# Altium PCB MDBU004A.PcbDoc (part 2 of 2)
Units mil, origin at the board's own origin, x right, y up, seen from the top; angles counter-clockwise.
Board outline 2000 x 3000 mil, 2 copper layers (Top Layer, Bottom Layer), stack 63.4 mil thick; 60 components, 60 nets, 274 pads, 201 vias.
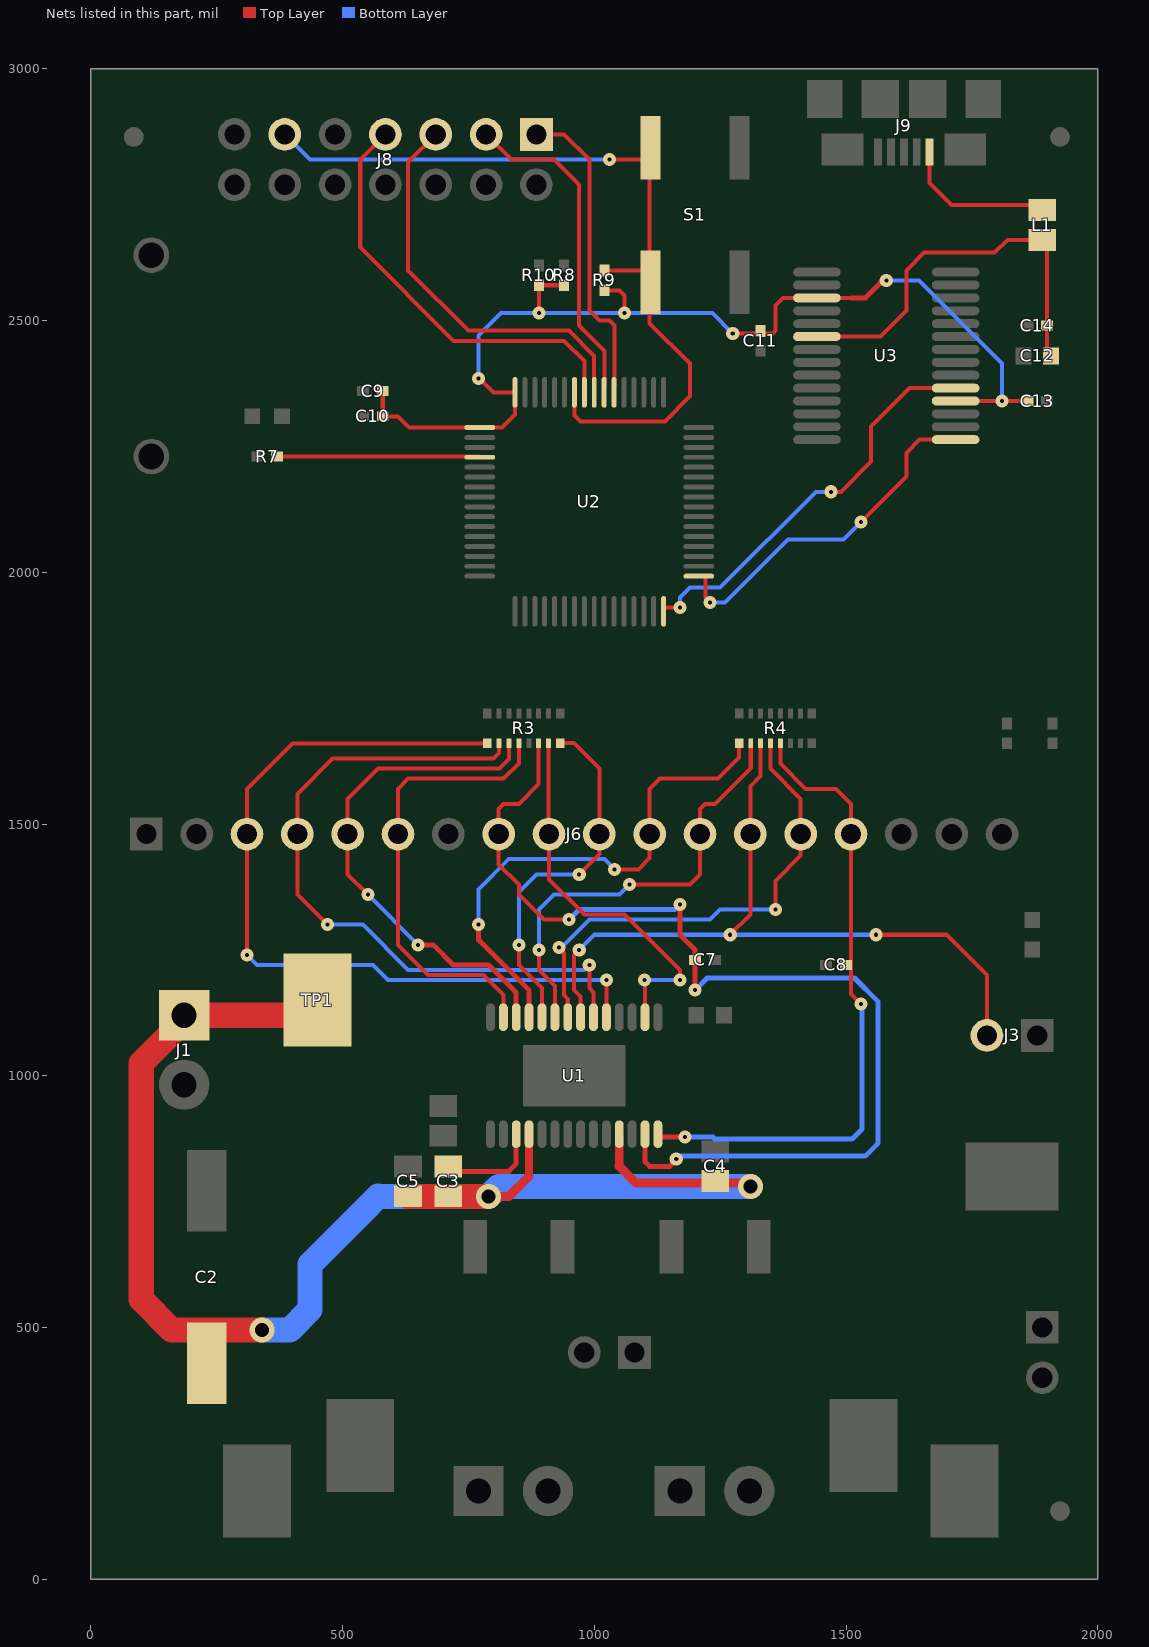
[diagram p2: the nets of this part, all layers, seen from the top]

## Via types
v1: diameter 26, hole 8, Top Layer to Bottom Layer, tented both sides, 180 vias
v2: diameter 19.68, hole 7.87, Top Layer to Bottom Layer, 15 vias
v3: diameter 50, hole 28, Top Layer to Bottom Layer, tented both sides, 5 vias
v4: diameter 26, hole 8, Top Layer to Bottom Layer, tented top, 1 vias

## Nets (pads, with @x,y where several pads share a name; then routed paths per layer and width w, separated by ;. In a path a pad name is that pad's centre, name@x,y a point inside that pad or via, vN(x,y) a via of type N, cw(c..) or ccw(c..) an arc to the next point about the centre after c; other vN are vias at no path point) (continued)
PIN13: C7.1 J6.8 R3.6 U1.13 | length 2093
  Top Layer w8: R3.6@889.53,1660.47 889.53,1579.53 850,1540 820,1540 810,1530 810,1490 810,1420 850,1380 850,1360 900,1310 v1(950,1310)
  Top Layer w10: U1.13@1100.75,857.8 1100.75,829.25 1110,820 1150,820 1162.76,832.76 v1(1162.76,834.49) ; v1(1170,1340) 1170,1280 1200.32,1249.68 C7.1@1200.32,1230 v1(1200.32,1170)
  Bottom Layer w10: v1(950,1310) 970,1330 1160,1330 v1(1170,1340) ; v1(1162.76,834.49) 1168.27,840 1538,840 1564,866 1564,1147 1517,1194 1224.32,1194 v1(1200.32,1170)
PIN14: C8.1 J6.15 R4.5 U1.14 | length 1285.5
  Top Layer w8: R4.5@1369.84,1660.47 1369.84,1620.16 1420,1570 1480,1570 1510,1540 1510,1490 1510,1162 v1(1530,1142)
  Top Layer w10: U1.14@1126.34,877.8 v1(1180,877.8)
  Bottom Layer w10: v1@1183.6,874.2 v1(1180,877.8) 1235.61,877.8 1239.28,874.13 1512.13,874.13 1532,894 v1@1532,1139
PIN19: J6.3 R3.1 U1.19 | length 1649.6
  Top Layer w8: v1(310,1240) 310,1490 310,1570 400,1660 R3.1@787.66,1660 ; U1.19@1023.98,1120 v1(1023.98,1190)
  Bottom Layer w8: v1(310,1240) 330,1220 560,1220 590,1190 v1(1023.98,1190)
PIN20: J6.4 R3.2 U1.20 | length 1404.4
  Top Layer w8: v1(470,1300) 410,1360 410,1560 480,1630 800,1630 810.79,1640.79 R3.2@810.79,1660.47 ; v1(990,1220) 990,1173.98 998.39,1165.59 998.39,1121.61 U1.20@1000,1120
  Bottom Layer w8: v1(470,1300) 540,1300 630,1210 980,1210 v1(990,1220)
PIN21: J3.2 J6.13 R4.3 U1.21 | length 1520.5
  Top Layer w8: v1(970,1250) 960,1240 960,1170 972.8,1157.2 U1.21@972.8,1120 ; v1(1270,1280) 1310,1320 1310,1490 1310,1575 1330.47,1595.47 R4.3@1330.47,1660.47 ; v1(1560,1280) 1700,1280 1780,1200 J3.2@1780,1080
  Bottom Layer w8: v1(970,1250) 1000,1280 v1(1270,1280) v1(1560,1280)
PIN22: J6.14 R4.4 U1.22 | length 979.2
  Top Layer w8: v1(930,1255) 940,1245 940,1160 947.2,1152.8 U1.22@947.2,1120 ; R4.4@1350.16,1660.47 1350.16,1609.84 1410,1550 1410,1490 1410,1437 1360,1387 v1(1360,1330)
  Bottom Layer w8: v1(930,1255) 935,1255 990,1310 1230,1310 1250,1330 v1(1360,1330)
PIN23: J6.12 R4.2 U1.23 | length 876
  Top Layer w8: v1(890,1250) 890,1210 921.61,1178.39 U1.23@921.61,1120 ; v1(1070,1380) 1190,1380 1210,1400 1210,1490 1210,1530 1220,1540 1240,1540 1310.79,1610.79 R4.2@1310.79,1660.47
  Bottom Layer w8: v1@890,1260 890,1330 920,1360 1050,1360 v1(1070,1380)
PIN24: J6.10 R3.8 U1.24 | length 723.7
  Top Layer w8: v1(850,1260) 850,1220 896.02,1173.98 U1.24@896.02,1120 ; R3.8@932.34,1660.47 959.53,1660.47 1010,1610 1010,1490 1010,1440 v4(970,1400)
  Bottom Layer w8: v1(850,1260) 850,1365 885,1400 v4(970,1400)
PIN25: J6.11 R4.1 U1.25 | length 1043.5
  Top Layer w8: v1(1040,1410) 1088,1410 1110,1432 1110,1490 1110,1570 1130,1590 1245.32,1590 1287.66,1632.34 R4.1@1287.66,1660.47
  Top Layer w10: v1(770,1300) 770,1270 870.43,1169.57 U1.25@870.43,1120
  Bottom Layer w8: v1(770,1300) 770,1370 830,1430 1020,1430 v1(1040,1410)
RST: J8.11 R9.1 S1.3 S1.4 U2.58 | length 1740.1
  Top Layer w8: U2.58@960,2380 960.18,2357.52 U2.58@960.4,2329.6 ; U2.58@960.47,2357.52 960.47,2311.73 972.2,2300 1140,2300 1190,2350 1190,2414.72 1110,2494.72 S1.3@1110,2850 ; R9.1@1020,2600 S1.4@1120,2600 ; v1(1030,2820) S1.3@1120,2820
  Bottom Layer w8: J8.11@385,2870 435,2820 v1(1030,2820)
RX: U2.32 U3.5 | length 846
  Top Layer w8: U2.32@1137.7,1929 1138.7,1930 v1(1170,1930) ; v1(1470,2160) 1490,2160 1550,2220 1550,2290 1626,2366 U3.5@1750,2366
  Bottom Layer w8: v1(1170,1930) 1170,1950 1190,1970 1250,1970 1440,2160 v1(1470,2160)
STATUS: R7.2 U2.4 | length 398.3
  Top Layer w8: R7.2@371.65,2230 U2.4@770,2230
TCK: J8.7 U2.57 | length 832.9
  Top Layer w8: J8.7@585,2870 535,2820 535,2645 720,2460 940,2460 980.1,2419.9 U2.57@980.1,2371
TDI: J8.3 U2.55 | length 646.3
  Top Layer w8: J8.3@785,2870 834.99,2820 920,2820 970,2770 970,2490 1020,2440 1020,2371.5 U2.55@1019.5,2371
TDO: J8.1 U2.54 | length 607.5
  Top Layer w8: J8.1@885,2870 940,2870 990,2820 990,2520 1010,2500 1030,2500 1040,2490 1040,2371.8 U2.54@1039.2,2371
TMS: J8.5 U2.56 | length 791.9
  Top Layer w8: J8.5@685,2870 630,2815 630,2600 750,2480 949.6,2480 999.8,2429.8 U2.56@999.8,2371
TOFF: J6.9 R3.7 U1.16 | length 765.4
  Top Layer w8: R3.7@909.21,1660.47 909.21,1490.79 910,1490 910,1390 980,1320 1060,1320 1170,1210 v1(1170,1190) ; U1.16@1100.75,1120 v1@1100.75,1190
  Bottom Layer w8: v1(1100,1190) v1(1170,1190)
TRQ0: J6.6 R3.4 U1.27 | length 902.4
  Top Layer w8: U1.27@819.25,1120 819.25,1160.75 780,1200 670,1200 610,1260 610,1380 610,1570 630,1590 820,1590 850.16,1620.16 R3.4@850.16,1660.47
TRQ1: J6.5 R3.3 U1.26 | length 1011.8
  Top Layer w8: v1(550,1360) 510,1400 510,1550 570,1610 811.25,1610 830.47,1629.22 R3.3@830.47,1660.47
  Top Layer w10: v1(650,1260) 680,1260 720,1220 790,1220 844.84,1165.16 U1.26@844.84,1120
  Bottom Layer w8: v1(550,1360) v1(650,1260)
TX: U2.33 U3.1 | length 762
  Top Layer w8: U2.33@1220.9,1992.2 1220.9,1949.1 v1(1230,1940) ; v1(1530,2100) 1620,2190 1620,2237.32 1646.34,2263.66 U3.1@1717.8,2263.66 ; U3.1@1693.6,2263.6 U3.1@1750,2263.6
  Bottom Layer w8: v1(1230,1940) 1260,1940 1385,2065 1495,2065 v1(1530,2100)
V3P3: C9.1 C10.1 C11.1 C13.1 R8.1 R9.2 R10.1 U2.1 U2.64 U3.4 U3.17 | length 2174.9
  Top Layer w8: C9.1@579.68,2360 C10.1@579.68,2310 610,2310 630,2290 ; 632.36,2287.64 U2.1@772.48,2287.64 816.38,2287.64 842.36,2313.62 U2.64@842.36,2357.52 799.72,2357.52 772.24,2385 v1(770,2385) ; v1(890,2515) R10.1@890,2560.32 ; R10.1@890,2570.31 R8.1@940,2570.31 ; R9.2@1020,2560.31 1020.31,2560 1050,2560 1060,2550 v1(1060,2515) ; v1(1275,2474.68) 1354.68,2474.68 1360,2480 1360,2530 1375.2,2545.2 1510,2545.2 ; U3.4@1685.4,2340.4 U3.4@1738.9,2340.4 ; U3.4@1750,2340 v1(1810,2340) C13.1@1858.37,2340
  Top Layer w10: 1510,2545.2 1538.61,2545.2 1573.41,2580 v1(1580,2580)
  Bottom Layer w8: v1@770,2380 v1(770,2385) 770,2470 815,2515 v1(890,2515) v1(1060,2515) 1234.68,2515 v1(1275,2474.68) ; v1(1580,2580) 1644.72,2580 1810,2414.72 v1(1810,2340)
VBUS: J9.1 L1.2 | length 323.2
  Top Layer w8: J9.1@1666.18,2840 1666.18,2773.82 1710,2730 L1.2@1905,2730
VCP: C3.1 U1.3 | length 207.9
  Top Layer w10: C3.1@700,819.53 709.53,810 830,810 844.84,824.84 U1.3@844.84,877.8
VM: C2.1 C3.2 C4.2 C5.2 J1.1 TP1.1 U1.4 U1.11 | length 2972.8
  Top Layer w16: 870.43,800.43 U1.4@870.43,876.35 ; 1049.57,820.43 U1.11@1049.57,877.8
  Top Layer w18: v3@780,760 v3(790,760) 830,760 870.43,800.43 ; 1049.57,820.43 1083.31,786.69 1303.31,786.69 v3(1310,780)
  Top Layer w50: v3(340.05,495) 160.05,495 100,555.05 100,590 100,1025 175,1100 195,1120 TP1.1@480,1120 ; C5.2@630,760.3 v3(790,760)
  Bottom Layer w50: v3(340.05,495) 395,495 435.34,535.34 435.34,625.29 540.05,730 570.52,760.47 v3(790,760) 810,780 v3(1310,780)
VUSB: C12.1 C14.1 L1.1 U3.20 | length 812
  Top Layer w8: U3.20@1442.2,2468.39 1568.39,2468.39 1620,2520 1620,2600 1655,2635 1795,2635 1820.47,2660.47 L1.1@1890,2660.47 1899.68,2650.79 C14.1@1899.68,2490 1899.68,2437.87 C12.1@1907.56,2430
pads on no net: FID1.1 FID2.1 FID3.1 J8.6 J8.8 J8.10 J8.12 J8.13 J8.14 J9.4 LBL1.0 U2.2 U2.3 U2.7 U2.8 U2.9 U2.12 U2.13 U2.14 U2.15 U2.16 U2.17 U2.18 U2.19 U2.28 U2.29 U2.30 U2.31 U2.34 U2.35 U2.36 U2.39 U2.40 U2.44 U2.45 U2.46 U2.47 U2.48 U2.49 U2.50 U2.51 U2.52 U2.53 U2.59 U2.60 U2.61 U3.2 U3.3 U3.6 U3.8 U3.9 U3.10 U3.11 U3.12 U3.13 U3.14 U3.19 U3.22 U3.23 U3.24 U3.27 U3.28

## Polygon pours and split planes (outlines as drawn)
GND on Top Layer "Top Layer-GND" (solid, remove dead copper, pour order 12): 0,9 0,3009 2000,3009 2000,9
GND on Bottom Layer "Bottom Layer-GND" (solid, remove dead copper, pour order 8): 0,10 0,3010 2000,3010 2000,10

## Keep-outs
Keep-Out Layer:
  lines w47.24: -23.62,0 ccw(c0,0) 0,-23.62 ; -23.62,0 ccw(c0,0) 0,-23.62 ; -23.62,0 -23.62,3000 ; -23.62,3000 cw(c0,3000) 0,3023.62 ; -23.62,3000 cw(c0,3000) 0,3023.62 ; 0,-23.62 2000,-23.62 ; 0,3023.62 2000,3023.62 ; 2000,-23.62 ccw(c2000,0) 2023.62,0 ; 2000,-23.62 ccw(c2000,0) 2023.62,0 ; 2000,3023.62 cw(c2000,3000) 2023.62,3000 ; 2000,3023.62 cw(c2000,3000) 2023.62,3000 ; 2023.62,0 2023.62,3000
  text ".Layer_Name" at 577,-858.49 h60

## Other copper
Top Layer:
  region net GND: 881.73,2290 862.05,2290 862.05,2330 881.73,2330
  region net GND: 1370,2340 1520,2340 1520,2310 1370,2310
  region net GND: 805.88,1963.21 827.22,1984.55 834.55,1977.22 813.21,1955.88
  text ".Layer_Name" at 577,-858.49 h60
Bottom Layer:
  text ".Layer_Name" at 577,-858.49 h60

## Silkscreen, mask and mechanical layers (free items; w line width, h text height)
Top Overlay:
  circle w20: c768.52,820 r8.52
  lines w7: 30,2030 720,2030 ; 120,2100 720,2100 ; 630,580 1370,580 1370,1170 1221.52,1170 ; 640,580 580,580 580,1170 1178.12,1170
  lines w8: 960,1690 1260,1690 ; 1460,1690 1680,1690
  lines w10: 120,1640 120,2170 ; 350,1640 350,2098 ; 545,1640 545,1840 ; 545,2032 545,2098 ; 30,1640 30,2170 720,2170 720,1640 30,1640
  text "MCU Reset" at 1080,2930 h30
  text "GND" at 170,2610 h40
  text "Status" at 200,2360 h30
  text "P" at 60,2126 h30
  text "DRV88XX" at 320,2125 h28
  text "I" at 60,2084 h30
  text "80" at 200,2045 h28
  text "81E" at 410,2045 h28
  text "81P" at 610,2045 h28
  text "N" at 60,2042 h30
  text ".PRJ_Number" at 1520,2040 h30
  text ".PCB_Rev" at 1520,1990 h30
  text "13" at 50,1980 h28
  text "ATE" at 155,1980 h28
  text "AVREF" at 480,1980 h28
  text "14" at 50,1940 h28
  text "VREF" at 155,1940 h28
  text "BVREF" at 480,1940 h28
  text "19" at 50,1900 h28
  text "DECAY1" at 155,1900 h28
  text "BDECAY" at 470,1900 h28
  text "20" at 50,1860 h28
  text "DECAY0" at 155,1860 h28
  text "ADECAY" at 470,1860 h28
  text "21" at 50,1820 h28
  text "ENABLE" at 155,1820 h28
  text "BEN" at 400,1820 h28
  text "BIN2" at 600,1820 h28
  text "22" at 50,1780 h28
  text "DIR" at 155,1780 h28
  text "BPH" at 400,1780 h28
  text "BIN1" at 600,1780 h28
  text "23" at 50,1740 h28
  text "STEP" at 155,1740 h28
  text "AEN" at 400,1740 h28
  text "AIN2" at 600,1740 h28
  text "24" at 50,1700 h28
  text "M1" at 155,1700 h28
  text "APH" at 400,1700 h28
  text "AIN1" at 600,1700 h28
  text "25" at 50,1660 h28
  text "M0" at 155,1660 h28
  text "ATE" at 395,1660 h28
  text "PARA" at 600,1660 h28
  text "GND" at 95,1410 h30 r270
  text "GND" at 190,1410 h30 r270
  text "PIN19" at 300,1410 h30 r270
  text "PIN20" at 400,1410 h30 r270
  text "TRQ1" at 500,1410 h30 r270
  text "TRQ0" at 600,1410 h30 r270
  text "8xV3P3" at 700,1410 h30 r270
  text "PIN13" at 805,1410 h30 r270
  text "TOFF" at 900,1410 h30 r270
  text "PIN24" at 995,1410 h30 r270
  text "PIN25" at 1100,1410 h30 r270
  text "PIN23" at 1200,1410 h30 r270
  text "PIN21" at 1295,1410 h30 r270
  text "PIN22" at 1395,1410 h30 r270
  text "PIN14" at 1500,1410 h30 r270
  text "nSLEEP" at 1595,1410 h30 r270
  text "nFAULT" at 1695,1410 h30 r270
  text "GPIO_V3P3" at 1790,1410 h30 r270
  text "nFAULT" at 1930,1370 h30 r270
  text "VM" at 90,1230 h40
  text "VM" at 410,980 h40
  text "Retry" at 1740,970 h40
  text "GND" at 70,840 h40
  text "DRV888X" at 840,740 h40
  text "GND" at 1740,660 h40
  text "Parallel" at 888,520 h45
  text "GND" at 1710,430 h40
  text "AOUT1" at 467.5,400.38 h30
  text "BOUT1" at 1470,400 h30
  text "BOUT2" at 1667.5,318.3 h30
  text "AOUT1" at 670,310 h30
  text "AOUT2" at 850,310 h30
  text "BOUT2" at 1090,310 h30
  text "BOUT1" at 1280,310 h30
  text "AOUT2" at 80,140 h30
  text ".Layer_Name" at 577,-858.49 h60
Bottom Overlay:
  text ".Layer_Name" at 577,-858.49 h60
Top Paste:
  text ".Layer_Name" at 577,-858.49 h60
Bottom Paste:
  text ".Layer_Name" at 577,-858.49 h60
Top Solder:
  text ".Layer_Name" at 577,-858.49 h60
  text ".Layer_Name" at 577,-858.49 h60
Bottom Solder:
  text ".Layer_Name" at 577,-858.49 h60
Drill Guide:
  text ".Layer_Name" at 577,-858.49 h60
M1 Board Outline:
  the board outline again, w10
  text ".Layer_Name" at 577,-858.49 h60
M2 Board Dimensions:
  rectangle: 0,-275 125,-150
  rectangle: 125,-400 500,-275
  lines w7: 0,-275 1000,-275 ; 125,-400 125,-150 ; 250,-400 250,-150 ; 500,-400 500,-150 ; 750,-400 750,-150 ; 0,-400 1000,-400 1000,-150 0,-150 0,-400
  text ".Layer_Name" at 577,-858.49 h60
M3 3D STEP Top:
  text ".Layer_Name" at 577,-858.49 h60
M4 3D STEP Bottom:
  text ".Layer_Name" at 577,-858.49 h60
M5 Assembly Top:
  lines w10: -292,-930.17 6308,-930.17 ; -292,-726.83 6310,-726.83 ; -292,-523.5 -292,-1133.5 3713,-1133.5 6310,-1133.5 6310,-523.5 -291.5,-523.5 -291.5,-1133.5 1284,-1133.5 ; 2173,-1133.5 2173,-523.5 ; 3440,-726.83 3440,-523.5 ; 4280,-726.83 4280,-523.5 ; 4902,-1140 4902,-937.17
  text "COMPONENTS MARKED 'DNP' SHOULD NOT BE POPULATED." at 1153.5,-318.5 h60
  text "ASSEMBLY VARIANT:" at 1153,-434 h60
  text ".VariantName" at 2189,-434 h60
  text "PCB VIEWED FROM TOP SIDE" at -228.5,-655.67 h60
  text "BOARD #:" at 2248,-655.67 h60
  text ".PRJ_Number" at 2793.5,-655.67 h60
  text "REV:" at 3638,-655.67 h60
  text ".PCB_Rev" at 3929.5,-655.67 h60
  text "SVN REV:" at 4476,-655.67 h60
  text ".VersionControl_RevNumber" at 4982,-655.67 h60
  text "TID #:" at 2248,-859 h60
  text ".TID" at 2793.5,-859 h60
  text "PLOT NAME =" at -228.5,-1064.34 h60
  text ".plot_File_Name" at 577,-1064.34 h60
  text "GENERATED    :" at 2250,-1064.34 h60
  text ".Print_Date" at 3119.5,-1064.34 h60
  text ".Print_Time" at 3848.5,-1064.34 h60
  text "TEXAS INSTRUMENTS" at 5113,-1064.34 h60
M6 Assembly Bottom:
  lines w10: -292.5,-727.33 6309.5,-727.33 ; -290.5,-930.67 6309.5,-930.67 ; 1115.5,-1140.5 1115.5,-937.67 ; 1737.5,-727.33 1737.5,-524 ; 2577.5,-727.33 2577.5,-524 ; 3844.5,-1134 3844.5,-524 ; 4733.5,-1134 6309,-1134 6309,-524 -292.5,-524 -292.5,-1134 2304.5,-1134 6309.5,-1134 6309.5,-524
  text "COMPONENTS MARKED 'DNP' SHOULD NOT BE POPULATED." at 6102,-318 h60
  text ".VariantName" at 5058,-434 h60
  text "ASSEMBLY VARIANT:" at 6097,-434 h60
  text ".VersionControl_RevNumber" at 1035.5,-656.17 h60
  text "SVN REV:" at 1541.5,-656.17 h60
  text ".PCB_Rev" at 2088,-656.17 h60
  text "REV:" at 2379.5,-656.17 h60
  text ".PRJ_Number" at 3224,-656.17 h60
  text "BOARD #:" at 3769.5,-656.17 h60
  text "PCB VIEWED FROM BOTTOM SIDE" at 6246,-656.17 h60
  text ".TID" at 3224,-859.5 h60
  text "TID #:" at 3769.5,-859.5 h60
  text "TEXAS INSTRUMENTS" at 904.5,-1064.84 h60
  text ".Print_Time" at 2169,-1064.84 h60
  text ".Print_Date" at 2898,-1064.84 h60
  text "GENERATED    :" at 3767.5,-1064.84 h60
  text ".plot_File_Name" at 5440.5,-1064.84 h60
  text "PLOT NAME =" at 6246,-1064.84 h60
M9 Title Sheet:
  drawing of 57 lines, arcs and shapes, not listed
  text "1" at 739.84,8036.5 h70
  text "2" at 3235.5,8036.5 h70
  text "3" at 5724.84,8036.5 h70
  text "4" at 8231.51,8036.5 h70
  text "5" at 10730.5,8036.5 h70
  text "6" at 13235.5,8036.5 h70
  text "A" at -416.5,6893.5 h70
  text "A" at 14383.5,6893.5 h70
  text "B" at -416.5,4513.5 h70
  text "B" at 14383.5,4513.5 h70
  text "C" at -416.5,2138.5 h70
  text "C" at 14383.5,2138.5 h70
  text "PROJECT TITLE:" at 11343.5,277.5 h45
  text ".PRJ_Title" at 11393.5,144.17 h70
  text "DESIGNED FOR:" at 11343.5,-23.5 h45
  text ".PRJ_Customer" at 11393.5,-163.5 h70
  text "D" at -416.5,-231.5 h70
  text "D" at 14383.5,-231.5 h70
  text "FILE NAME:" at 11343.5,-323.5 h45
  text ".PCB_File_Name_No_Path" at 11393.5,-443.5 h70
  text "Texas Instruments (TI) and/or its licensors do not warrant the accuracy or completeness of this specification" at 6374,-605.34 h45
  text "ENGINEER:" at 11343.5,-613.5 h45
  text "LAYOUT BY:" at 12848.5,-613.5 h45
  text "or any information contained therein. TI and/or its licensors do not warrant that this design will meet" at 6329.01,-718 h45
  text ".PRJ_Engineer" at 11393.5,-768.49 h70
  text ".PCB_Layout" at 12899,-768.49 h70
  text "the specifications, will be suitable for your application or fit for any particular purpose, or will operate in" at 6329.01,-830.67 h45
  text ".Layer_Name" at 577,-858.49 h60
  text "ALTIUM DESIGNER VERSION:" at 12848.5,-923.5 h45
  text "an implementation. TI and/or its licensors do not warrant that the design is production worthy. You should" at 6329.01,-943.33 h45
  text "completely validate and test your design implementation to confirm the system functionality for your application." at 6374,-1056 h45
  text ".print_Scale" at 11393.5,-1056.83 h70
  text ".Application_BuildNumber" at 12899,-1056.83 h70
  text "1" at 739.84,-1263.5 h70
  text "2" at 3235.5,-1263.5 h70
  text "3" at 5724.84,-1263.5 h70
  text "4" at 8231.51,-1263.5 h70
  text "5" at 10730.5,-1263.5 h70
  text "6" at 13235.5,-1263.5 h70
M10 Fab Notes:
  drawing of 185 lines, arcs and shapes, not listed
  text "DESIGN INFORMATION" at 12381.02,5910 h60
  text "MIN. TRACK WIDTH:" at 11736.46,5730 h60
  text "8" at 12832.7,5730 h60
  text "MIL" at 12987.46,5730 h60
  text "MIN. CLEARANCE:" at 11736.46,5598 h60
  text "0.2" at 12772.7,5598 h60
  text "mm" at 12987.46,5598 h60
  text "MIN. VIA PAD SIZE:" at 11736.46,5466 h60
  text "24" at 12802.71,5466 h60
  text "MIL" at 12987.46,5466 h60
  text "0.05mm (2MIL)" at 12431.46,5324.29 h60
  text "MINIMUM ANNULAR RING" at 11407.23,5320 h60
  text "EXTERNAL" at 13139.46,5320 h60
  text "PER" at 11607.23,5202 h60
  text "IPC-D-275 CLASS 2 LEVEL C" at 11827.23,5202 h60
  text "MIL, HOLES" at 13315.46,5089.71 h60
  text "+/-" at 12923,5089 h60
  text "+/-" at 13777,5089 h60
  text "REGISTRATION TOLERANCES:" at 11407.23,5084 h60
  text "METAL" at 12607,5084 h60
  text "5" at 13183.2,5084 h60
  text "3" at 14016.2,5084 h60
  text "MIL" at 14132.46,5084 h60
  text "MATERIAL:" at 11332.46,4874.54 h60
  text "FR-4 High Tg" at 12318.9,4734.21 h60
  text "FR-408" at 11753.46,4725.64 h60
  text "X" at 12165.46,4725.64 h60
  text "OTHER" at 13241.46,4725.64 h60
  text "62 MIL (1.6mm) +/-10%" at 12073.56,4562.92 h60
  text "THICKNESS:" at 11407.23,4558.64 h60
  text "X" at 11945.4,4558.64 h60
  text "OTHER" at 13358.46,4558.64 h60
  text "TOLERANCE:" at 11407.23,4400.64 h60
  text "X" at 12246.53,4400.64 h60
  text "ANSI IPC-6012 TYPE 3 CLASS 2" at 12433.48,4400.64 h60
  text "OTHER +/-" at 12433.46,4244.64 h60
  text "BOW & TWIST:" at 11407.23,4087.64 h60
  text "X" at 12246.53,4087.64 h60
  text "ANSI IPC-6012 TYPE 3 CLASS 2" at 12433.48,4087.64 h60
  text "OTHER +/-" at 12433.46,3929.13 h60
  text "DRILLING:" at 11332.46,3790.64 h60
  text "REFERENCE:" at 11407.23,3673.64 h60
  text "X" at 12055.46,3673.64 h60
  text "AS SHOWN" at 12242.46,3673.64 h60
  text "X" at 12956.46,3673.64 h60
  text "NC_DRILL FILES" at 13093.46,3673.64 h60
  text "PTH MIN COPPER THICKNESS:" at 11407.23,3515.64 h60
  text "X" at 12757.46,3515.64 h60
  text "1MIL" at 12894.46,3515.64 h60
  text "OTHER" at 13391.46,3515.64 h60
  text "BOARD FINISH:" at 11332.46,3356.64 h60
  text "SILKSCREEN:" at 11487.68,3238.64 h60
  text "X" at 12436.46,3238.64 h60
  text "TOP" at 12562.46,3238.64 h60
  text "BOTTOM" at 13073.46,3238.64 h60
  text "SILKSCREEN COLOR:" at 11487.68,3071.64 h60
  text "X" at 12435.42,3071.64 h60
  text "WHITE" at 12562.46,3071.64 h60
  text "OTHER" at 13073.46,3071.64 h60
  text "SOLDER RESIST COLOR:" at 11487.68,2901.64 h60
  text "X" at 12055.42,2742.44 h60
  text "GREEN" at 12182.46,2742.44 h60
  text "BLUE" at 12773.46,2742.44 h60
  text "OTHER" at 13311.46,2742.44 h60
  text "IMMERSION GOLD (ENIG)" at 12393.46,2553.92 h60
  text "ENEPIG" at 13731,2550.64 h60
  text "SURFACE FINISH:" at 11332.46,2549.64 h60
  text "X" at 12206.51,2549.64 h60
  text "IMM. TIN/SILVER OR EQUIV" at 11662,2392.64 h60
  text "OTHER" at 13093.46,2392.64 h60
  text "ARRAY/PANEL:" at 11332.46,2213.64 h60
  text "CUT AND TRIM PER MECH LAYER 1" at 12393.46,2209.35 h60
  text "N.C. ROUTE" at 12393.46,2057.64 h60
  text "X" at 13072.46,2057.64 h60
  text "V. SCORE" at 13259.46,2057.64 h60
  text "CERTIFICATION:" at 11332.46,1920.64 h60
  text "MATERIALS AND WORKMANSHIP FOR ALL PCBS" at 12057.46,1920.64 h60
  text "TO MEET OR EXCEED THE REQUIREMENTS OF:" at 12057.46,1822.64 h60
  text "X" at 11683.96,1686.13 h60
  text "ANSI IPC-A-600F CLASS ->" at 11822.96,1686.13 h60
  text "X" at 13462.02,1686.13 h60
  text "2" at 13580.96,1686.14 h60
  text "1" at 13265.96,1684.64 h60
  text "3" at 13934.96,1684.64 h60
  text "X" at 11686.02,1526.64 h60
  text "UL 94V-0" at 11822.96,1526.64 h60
  text "X" at 12498.02,1526.64 h60
  text "RoHS" at 12634.96,1526.64 h60
  text "OTHER" at 13279.36,1526.64 h60
  text "PER ORDER" at 13676.42,1526.64 h60
  text "ADDITIONAL REQUIREMENTS:" at 11332.46,1385.64 h60
  text "MICROSECTION:" at 11407.23,1270.64 h60
  text "YES" at 12312.96,1270.64 h60
  text "REQUIRED" at 13174.46,1114.49 h60
  text "BARE BOARD ELEC. TEST:" at 11407.23,1111.64 h60
  text "NONE" at 12712.96,1111.64 h60
  text "X" at 13047.46,1111.64 h60
  text "PER ORDER" at 13766.46,1111.64 h60
  text "MANUFACTURER'S UL:" at 11407.23,954.64 h60
  text "RAIL" at 12572.96,950.35 h60
  text "METAL" at 13064.77,950.35 h60
  text "X" at 13440,950 h60
  text "SILK" at 13576.46,950.35 h60
  text ".Layer_Name" at 577,-858.49 h60
M11 Gerber Information:
  lines w10: -292,-930.17 6308,-930.17 ; -292,-726.83 6310,-726.83 ; -292,-523.5 -292,-1133.5 3713,-1133.5 6310,-1133.5 6310,-523.5 -291.5,-523.5 -291.5,-1133.5 1284,-1133.5 ; 2173,-1133.5 2173,-523.5 ; 3440,-726.83 3440,-523.5 ; 4280,-726.83 4280,-523.5 ; 4902,-1140 4902,-937.17
  text "ALL ARTWORK VIEWED FROM TOP SIDE" at -228.5,-655.67 h60
  text "BOARD #:" at 2248,-655.67 h60
  text ".PRJ_Number" at 2793.5,-655.67 h60
  text "REV:" at 3638,-655.67 h60
  text ".PCB_Rev" at 3929.5,-655.67 h60
  text "SVN REV:" at 4476,-655.67 h60
  text ".VersionControl_RevNumber" at 4982,-655.67 h60
  text "LAYER NAME =" at -228.5,-858.49 h60
  text "TID #:" at 2248,-859 h60
  text ".TID" at 2793.5,-859 h60
  text "PLOT NAME =" at -228.5,-1064.34 h60
  text ".plot_File_Name" at 577,-1064.34 h60
  text "GENERATED    :" at 2250,-1064.34 h60
  text ".Print_Date" at 3119.5,-1064.34 h60
  text ".Print_Time" at 3848.5,-1064.34 h60
  text "TEXAS INSTRUMENTS" at 5113,-1064.34 h60
M12 Stackup:
  drawing of 165 lines, arcs and shapes, not listed
  text "Layer" at 9790.55,7830 h60
  text "Name" at 10200.47,7830 h60
  text "Material" at 11060.23,7830 h60
  text "Thickness" at 11920,7830 h60
  text "Constant" at 12569.84,7830 h60
  text "Board Layer Stack" at 13139.7,7830 h60
  text "1" at 9790.55,7710 h60
  text "Top Overlay" at 10200.47,7710 h60
  text "2" at 9790.55,7590 h60
  text "Top Solder" at 10200.47,7590 h60
  text "Solder Resist" at 11060.23,7590 h60
  text "0.40mil" at 11920,7590 h60
  text "3.5" at 12569.84,7590 h60
  text "3" at 9790.55,7470 h60
  text "Top Layer" at 10200.47,7470 h60
  text "Copper" at 11060.23,7470 h60
  text "2.10mil" at 11920,7470 h60
  text "4" at 9790.55,7350 h60
  text "Dielectric1" at 10200.47,7350 h60
  text "FR-4" at 11060.23,7350 h60
  text "59.20mil" at 11920,7350 h60
  text "4.8" at 12569.84,7350 h60
  text "5" at 9790.55,7230 h60
  text "Bottom Layer" at 10200.47,7230 h60
  text "Copper" at 11060.23,7230 h60
  text "2.10mil" at 11920,7230 h60
  text "6" at 9790.55,7110 h60
  text "Bottom Solder" at 10200.47,7110 h60
  text "Solder Resist" at 11060.23,7110 h60
  text "0.40mil" at 11920,7110 h60
  text "3.5" at 12569.84,7110 h60
  text ".Layer_Name" at 577,-858.49 h60
M13 Component Bodies Top:
  text ".Layer_Name" at 577,-858.49 h60
M14 Component Bodies Bottom:
  text ".Layer_Name" at 577,-858.49 h60
M15 Courtyards Top:
  text ".Layer_Name" at 577,-858.49 h60
M16 Courtyards Bottom:
  text ".Layer_Name" at 577,-858.49 h60
Drill Drawing:
  circle w1: c3092.8,2770.83 r24.91
  circle w1: c3092.8,2621.37 r14.95
  circle w1: c3092.8,2621.37 r24.91
  lines w1: 3067.89,1998.63 3117.71,1998.63 3117.71,2048.45 3067.89,2048.45 3067.89,1998.63 ; 3067.89,2173 3092.8,2148.09 3117.71,2173 3092.8,2197.91 3067.89,2173 ; 3067.89,2297.54 3067.89,2310 3080.35,2322.45 3067.89,2334.91 3067.89,2347.36 3080.35,2347.36 3092.8,2334.91 3105.26,2347.36 3117.71,2347.36 3117.71,2334.91 3105.26,2322.45 3117.71,2310 3117.71,2297.54 3105.26,2297.54 3092.8,2310 3080.35,2297.54 3067.89,2297.54 ; 3067.89,2459.46 3080.35,2459.46 3092.8,2447 3105.26,2459.46 3117.71,2459.46 3105.26,2471.91 3117.71,2484.37 3105.26,2484.37 3092.8,2496.82 3080.35,2484.37 3067.89,2484.37 3080.35,2471.91 3067.89,2459.46 ; 3077.85,2008.59 3107.75,2008.59 3107.75,2038.48 3077.85,2038.48 3077.85,2008.59
  lines w12: 3000,1953.79 5119.4,1953.79 ; 3000,2850.54 5119.4,2850.54 ; 3370.67,1804.33 3370.67,3000 ; 3727.78,1804.33 3727.78,3000 ; 4389.79,1804.33 4389.79,3000 ; 4674.14,1804.33 4674.14,3000 ; 3000,1804.33 5119.4,1804.33 5119.4,3000 3000,3000 3000,1804.33
  text "Symbol" at 3089.68,2895.38 h72
  text "Quantity" at 3415.51,2895.38 h72
  text "Finished Hole Size" at 3772.62,2895.38 h72
  text "Plated" at 4434.62,2895.38 h72
  text "Hole Type" at 4718.98,2895.38 h72
  text "15" at 3415.51,2745.92 h60
  text "7.87mil (0.200mm)" at 3772.62,2745.92 h60
  text "PTH" at 4434.62,2745.92 h60
  text "Round" at 4718.98,2745.92 h60
  text "181" at 3415.51,2596.46 h60
  text "8.00mil (0.203mm)" at 3772.62,2596.46 h60
  text "PTH" at 4434.62,2596.46 h60
  text "Round" at 4718.98,2596.46 h60
  text "5" at 3415.51,2447 h60
  text "28.00mil (0.711mm)" at 3772.62,2447 h60
  text "PTH" at 4434.62,2447 h60
  text "Round" at 4718.98,2447 h60
  text "38" at 3415.51,2297.54 h60
  text "40.00mil (1.016mm)" at 3772.62,2297.54 h60
  text "PTH" at 4434.62,2297.54 h60
  text "Round" at 4718.98,2297.54 h60
  text "6" at 3415.51,2148.09 h60
  text "50.00mil (1.270mm)" at 3772.62,2148.09 h60
  text "PTH" at 4434.62,2148.09 h60
  text "Round" at 4718.98,2148.09 h60
  text "2" at 3415.51,1998.63 h60
  text "51.18mil (1.300mm)" at 3772.62,1998.63 h60
  text "PTH" at 4434.62,1998.63 h60
  text "Round" at 4718.98,1998.63 h60
  text "247 Total" at 3415.51,1849.17 h60
  text ".Layer_Name" at 577,-858.49 h60

## Dimensions
0,-400 to 1000,-400 on M2 Board Dimensions
0,3000 to 2000,0 on M2 Board Dimensions
2000,0 to 0,3000 on M2 Board Dimensions

## Text inside footprints (layer, text, board x,y; h text height)
J9: M1 Board Outline "board edge" at 1706.54,3031.85 h19.68 r180
Logo3: Top Overlay "Pb" at 1490.75,612.18 h120
Logo4: Top Overlay "not FCC approved for resale." at 197.95,2428.62 h60; Top Overlay "For evaluation only;" at 310.33,2482.01 h60
ZZ1: M5 Assembly Top "Install label in silkscreened box after final wash.  Text shall be 8 pt font.  Text shall be per the Label Table in the PDF schematic." at 321,3232 h40